# Altium PCB EtherWiz_Mini.PcbDoc (part 1 of 2)
Units mil, origin at the board's own origin, x right, y up, seen from the top; angles counter-clockwise.
Board outline 5188.98 x 2680 mil, 4 copper layers (Top Layer, GND, 5V, Bottom Layer), stack 23.756 mil thick; 69 components, 106 nets, 420 pads, 225 vias.
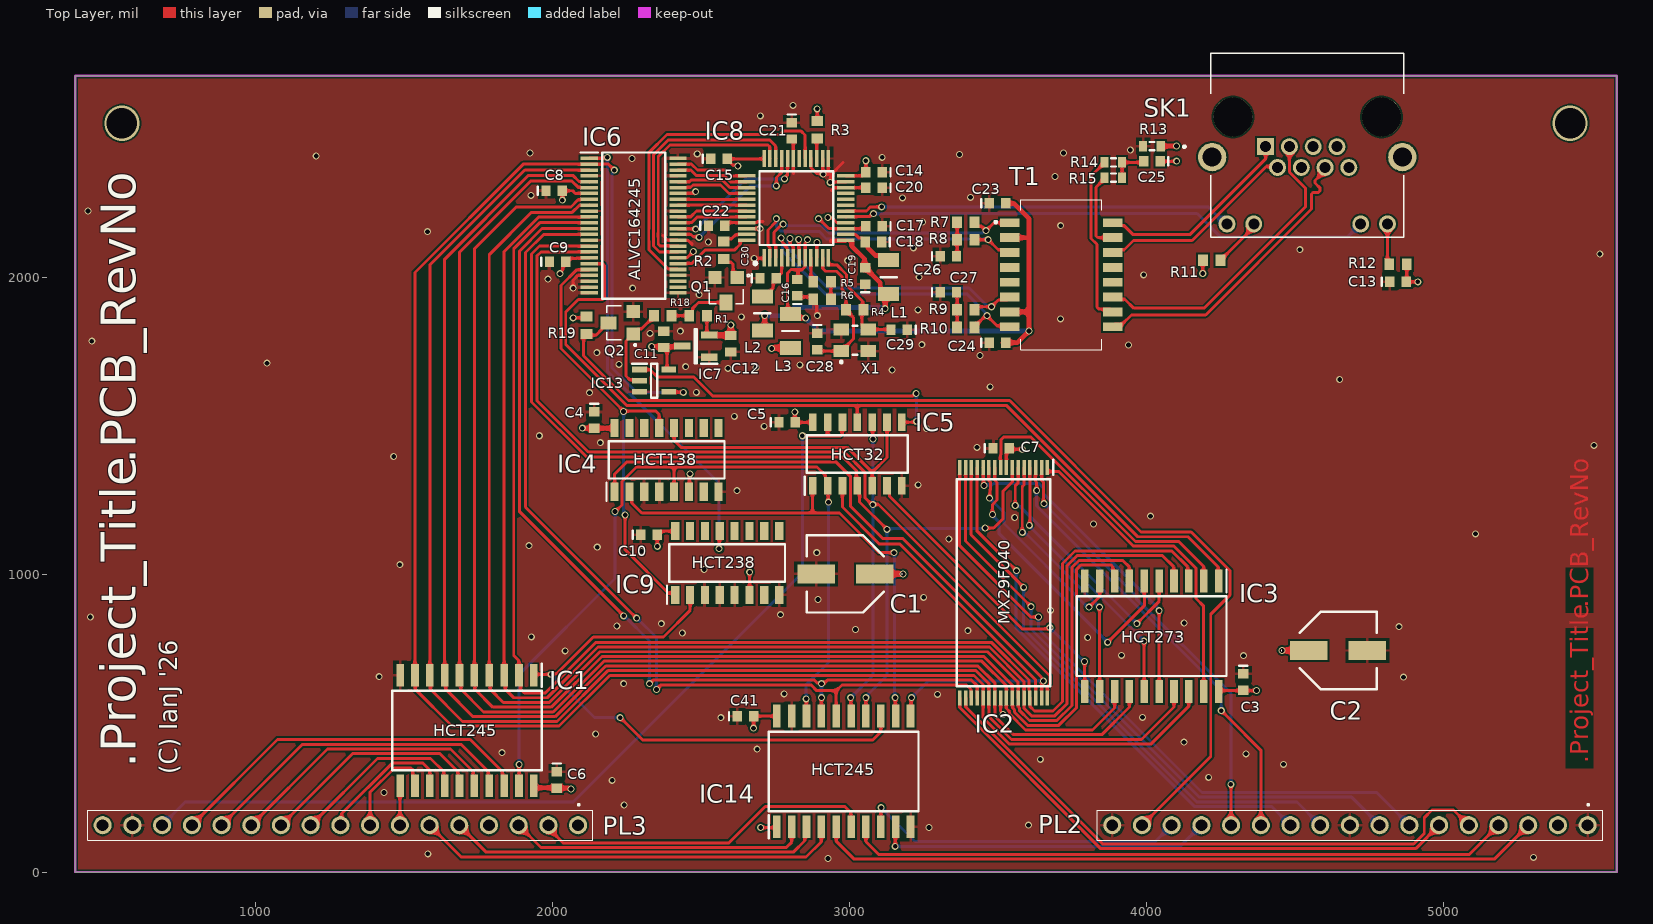
[diagram p0: Top Layer view]
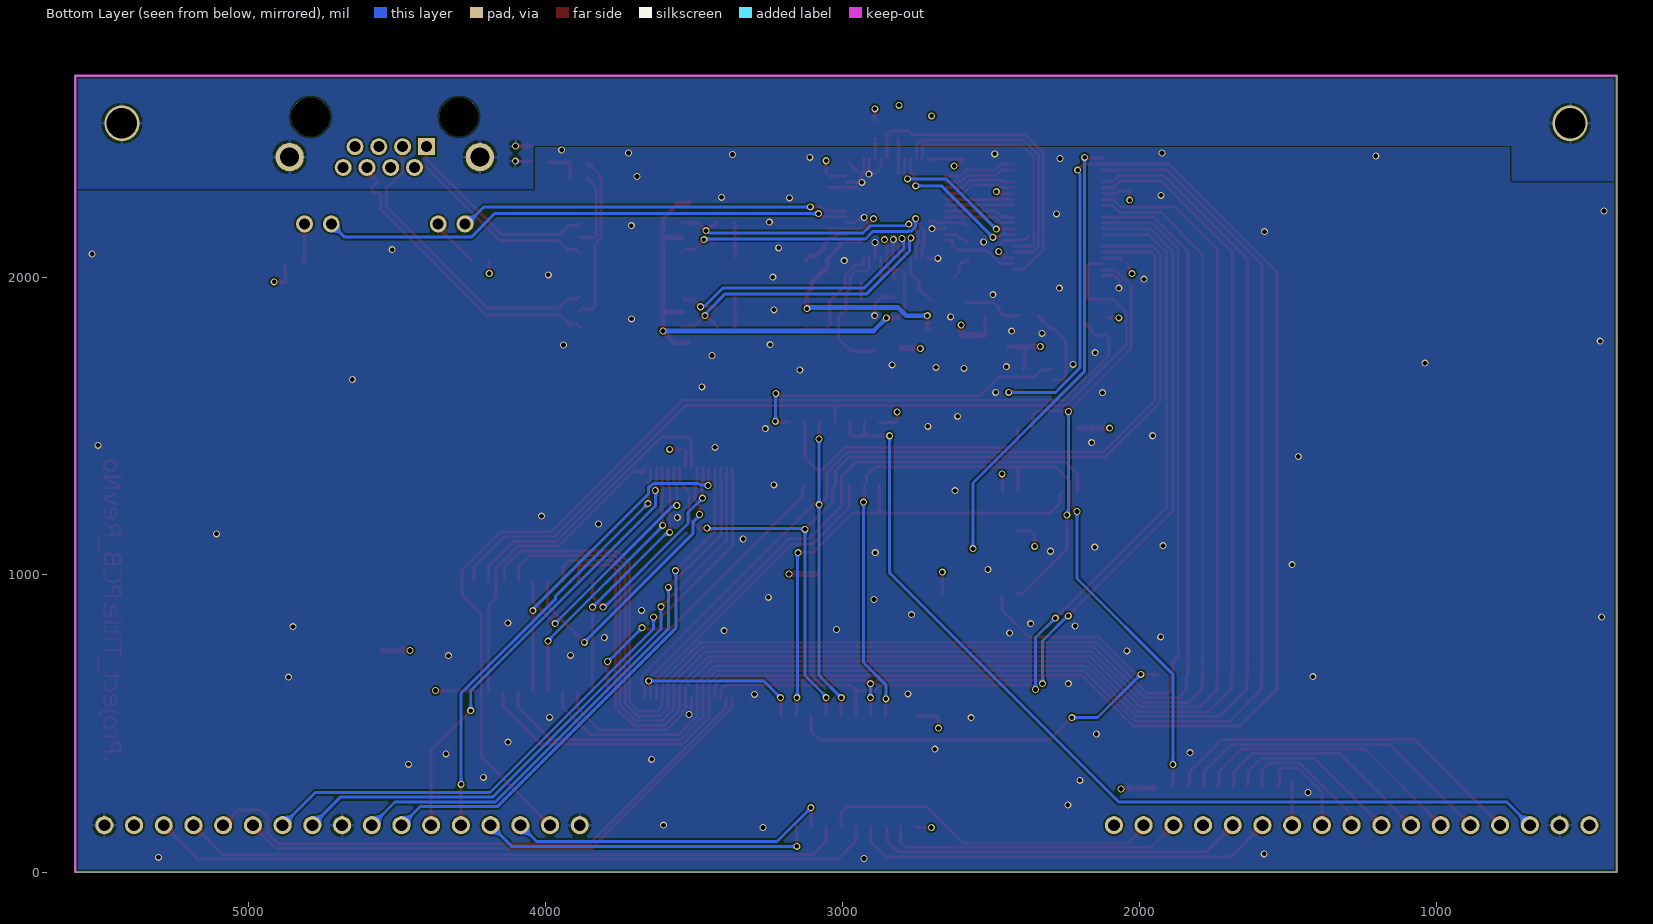
[diagram p1: Bottom Layer view, seen from below]
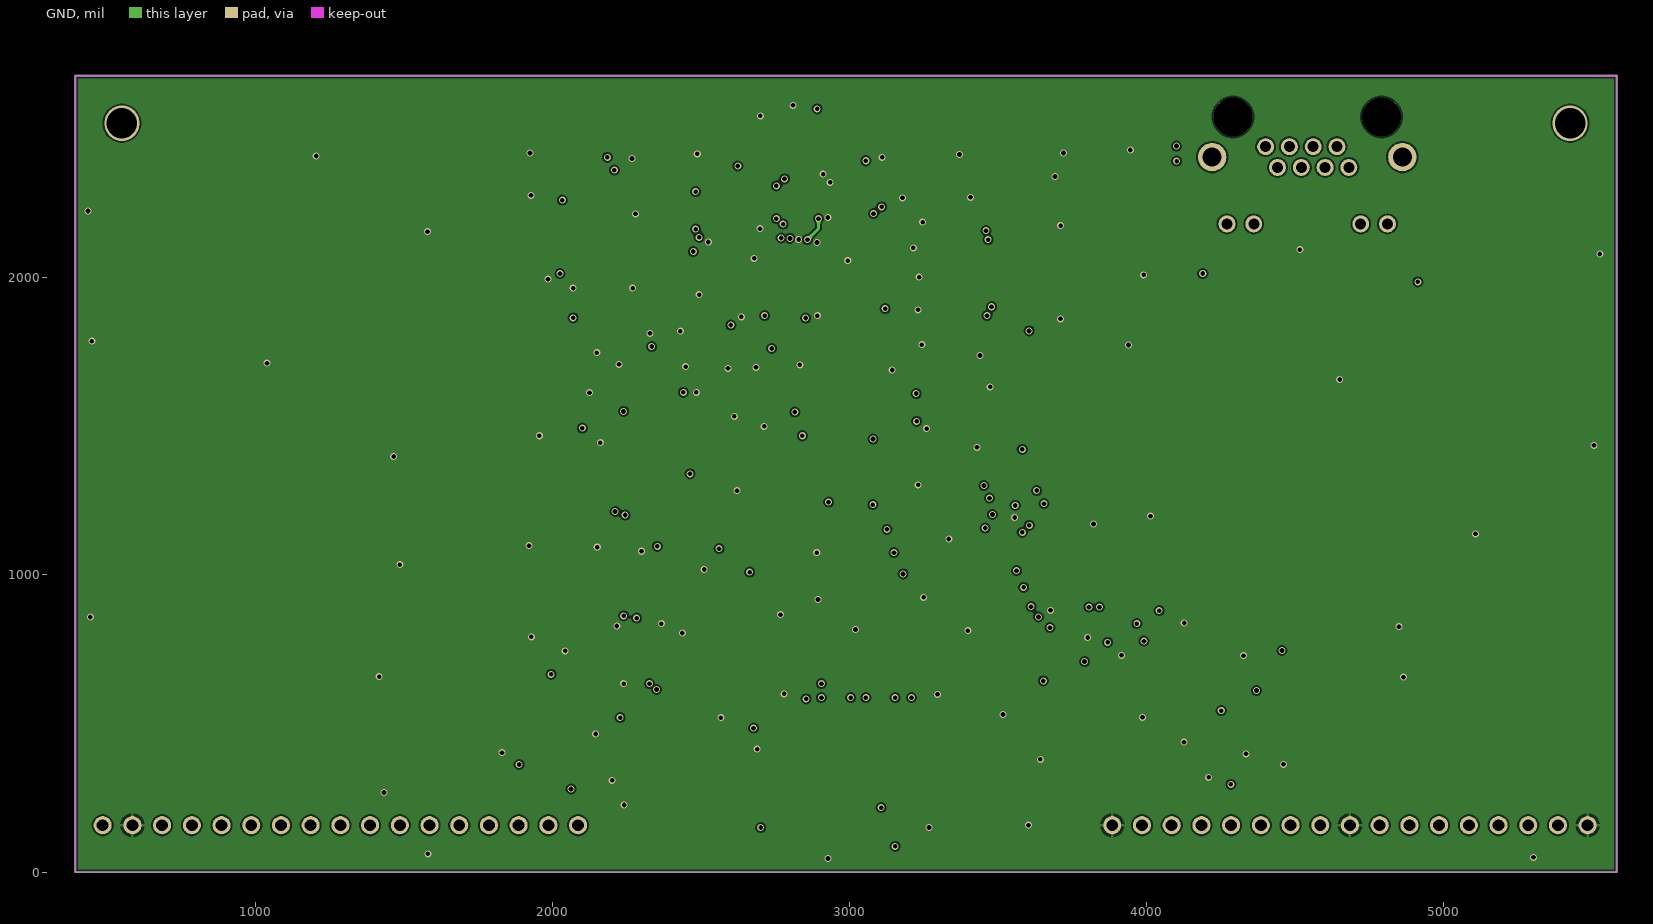
[diagram p2: GND]
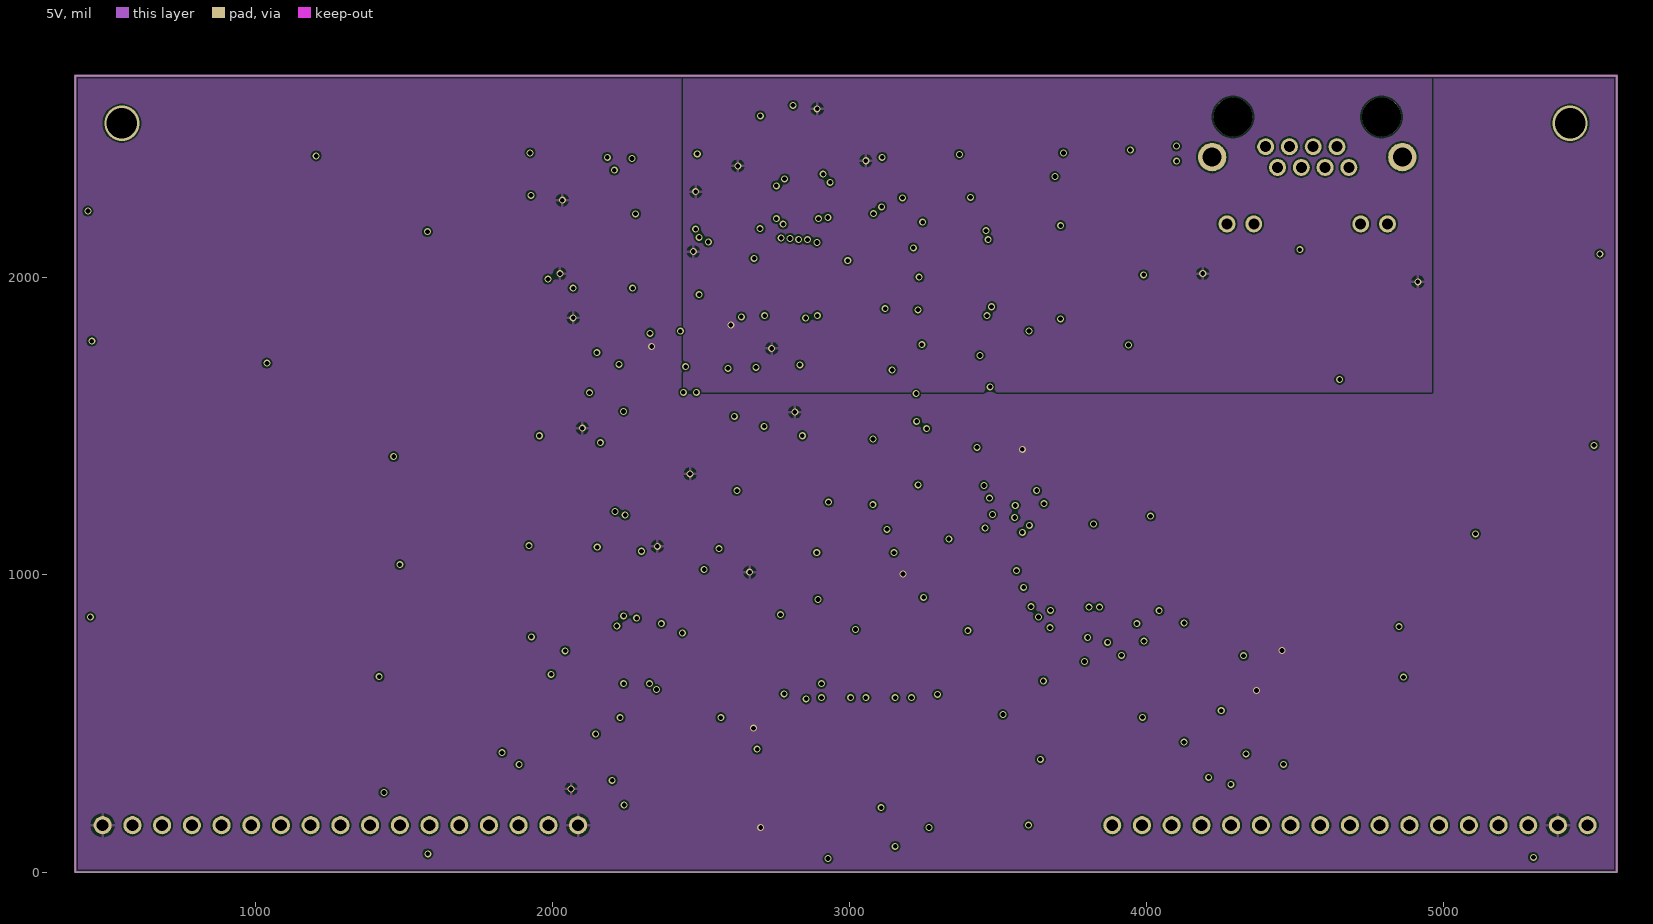
[diagram p3: 5V]
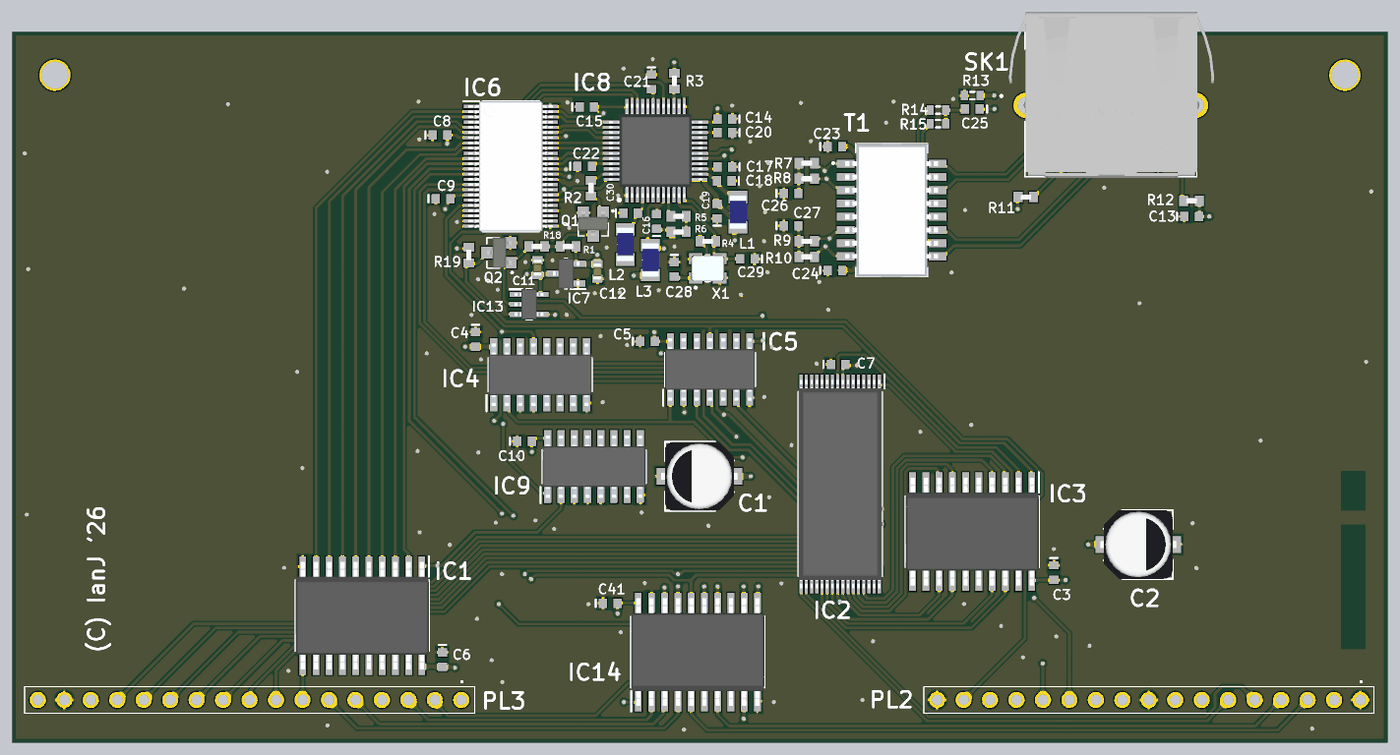
[diagram p5: 3D render of the assembled board from above, using the file's embedded part models]

## Layer stack, top to bottom
Top Solder: solder mask 0.4, Solder Resist, Dk 3.5
Top Layer: signal copper 1.4
Dielectric 1: prepreg 2.8, PP-006, Dk 4.1
GND: signal copper 1.378
Dielectric 2: prepreg 2.8, PP-006, Dk 4.1
5V: signal copper 1.378
Dielectric2: dielectric 12.6, FR-4, Dk 4.8
Bottom Layer: signal copper 1.4
Bottom Solder: solder mask 0.4, Solder Resist, Dk 3.5

## Board outline
393.7,0 5582.68,0 5582.68,2680 393.7,2680

## Design rules (kind name [scope] priority, off if disabled: settings)
Clearance [All] p1: gap=5.91 ignorepadtopadclearanceinfootprint=FALSE
DiffPairsRouting [All] p1: maxlimit=10 minlimit=10 mostfreqgap=10 toplayer_minwidth=10 toplayer_maxwidth=15 toplayer_prefwidth=10 midlayer1_minwidth=10 midlayer1_maxwidth=15 midlayer1_prefwidth=10 midlayer2_minwidth=10 midlayer2_maxwidth=15 midlayer2_prefwidth=10 bottomlayer_minwidth=10 bottomlayer_maxwidth=15 bottomlayer_prefwidth=10 maxuncoupledlength=500
HoleSize [All] p1: absolutevalues=TRUE maxlimit=196.85 minlimit=1 maxpercent=80.000 minpercent=20.000
MinimumSolderMaskSliver [All] p1: minsoldermaskwidth=3.94
PolygonConnect [All] p1: connectstyle=Relief reliefconductorwidth=10 reliefentries=4 polygonreliefangle="90 Angle" airgapwidth=10
RoutingVias [All] p1: holewidth=15.75 width=23.62 viastyle="Through Hole" minholewidth=15.75 minwidth=23.62 maxholewidth=28 maxwidth=50
SilkToSilkClearance [All] p1: silktosilkclearance=3.94
SilkToSolderMaskClearance [IsPad] p1: minsilkscreentomaskgap=3.94 clearancetoexposedcopper=TRUE
SolderMaskExpansion [All] p1: expansion=4 istentingtop=FALSE
SupplyNets "Schematic Supply Nets_8" [InNet('1v2d')] p1: voltage=0.000
SupplyNets "Schematic Supply Nets_7" [InNet('3v3a')] p2: voltage=0.000
SupplyNets "Schematic Supply Nets_5" [InNet('1v2o')] p3: voltage=0.000
SupplyNets "Schematic Supply Nets_4" [InNet('GND_CHASS')] p4: voltage=0.000
SupplyNets "Schematic Supply Nets_3" [InNet('GND')] p5: voltage=0.000
SupplyNets "Schematic Supply Nets_2" [InNet('1v2a')] p6: voltage=0.000
SupplyNets "Schematic Supply Nets_1" [InNet('3v3')] p7: voltage=0.000
SupplyNets "Schematic Supply Nets" [InNet('5V')] p8: voltage=0.000
Width [All] p1: maxlimit=19.68 minlimit=10 preferedwidth=10
25 further rules are at their usual default settings.

## Classes and differential pairs
component class EtherWiz_ROM: C3 C7 IC2 IC3
component class EtherWiz_Mini: C40 IC10 IC11 IC12 PL1 PL2 PL3 PL4 PL5_SK13 PL6_SK15 PL7_SK19 PL8_SK11 PL9_SK12 PL10_SK16 PL11 SK1_A4
component class EtherWiz: C1 C2 C4 C5 C8 C9 C10 C41 IC1 IC4 IC5 IC9 IC13 IC14
component class EtherWiz_Controller: C6 C11 C12 C13 C14 C15 C16 C17 C18 C19 C20 C21 C22 C23 C24 C25 C26 C27 C28 C29 C30 IC6 IC7 IC8 L1 L2 L3 Q1 Q2 R1 R2 R3 R4 R5 R6 R7 R8 R9 R10 R11 R12 R13 R14 R15 R18 R19 SK1 T1 X1
differential pair TX: +TX_P -TX_N
differential pair RX: +RX_P -RX_N
differential pair ETX: +ETX_P -ETX_N
differential pair ERX: +ERX_P -ERX_N

## Components (designator, comment, footprint, x,y, rotation, side; value= is the part's Value field where it differs from the comment)
C1 "EEE-HA1C470AP" EEE1AA101SP 2986.06,1003.23 r180 top
C2 "EEE-HA1C470AP" EEE1AA101SP 4644.37,745.51 r0 top
C3 "100n" CAPC1608L 4325.47,639.21 r270 top
C4 "100n" CAPC1608L 2140.43,1521.1 r270 top
C5 "100n" CAPC1608L 2790.04,1513.23 r0 top
C6 "100n" CAPC1608L 2014.92,310 r270 top
C7 "100n" CAPC1608L 3510.51,1426.61 r0 top
C8 "100n" CAPC1608L 2005.91,2293.46 r0 top
C9 "100n" CAPC1608L 2017.72,2053.31 r0 top
C10 "100n" CAPC1608L 2325.47,1135.28 r0 top
C11 "1uF" CAPC1608X90N 2374.87,1792.29 r270 top
C12 "1uF" CAPC1608X90N 2600.39,1777.72 r90 top
C13 "100n" CAPC1608L 4845.91,1986.1 r0 top
C14 "100n" CAPC1608L 3082.68,2354.33 r180 top
C15 "100n" CAPC1608L 2561.02,2399.76 r0 top
C16 "100n" CAPC1608L 2824.8,1966.69 r90 top
C17 "100n" CAPC1608L 3082.68,2173.23 r180 top
C18 "100nF" CAPC1608L 3080.71,2120.24 r180 top
C19 "100nF" CAPC1608L 3053.15,2006.06 r90 top
C20 "100nF" CAPC1608L 3082.68,2303.15 r180 top
C21 "100nF" CAPC1608L 2805.12,2494.25 r270 top
C22 "100nF" CAPC1608L 2553.15,2175.35 r0 top
C23 "100nF" CAPC1608L 3498.03,2250.16 r0 top
C24 "100nF" CAPC1608L 3498.03,1781.65 r0 top
C25 "1nF" CAPC1608L 4017.72,2391.89 r180 top
C26 "100nF" CAPC1608L 3332.68,2072.99 r0 top
C27 "100nF" CAPC1608L 3332.68,1950.94 r0 top
C28 "24pF" CAPC1608L 2891.73,1785.59 r270 top
C29 "24pF" CAPC1608L 3167.32,1824.96 r180 top
C30 "100nF" CAPC1608L 2726.38,1998.19 r0 top
C41 "100n" CAPC1608L 2649.61,523.62 r0 top
IC1 "SN74HCT245DWR" SOIC127P1030X265-20N 1712.6,476.38 r270 top locked
IC2 "MX29F040CTI-70G" SOP50P2000X120-32N 3518.39,973.86 r270 top locked
IC3 "SN74HCT273DWR" SOIC127P1030X265-20N 4017.01,793.74 r270 top locked
IC4 "74HCT138D,653" SOIC127P600X175-16N 2384.53,1387.24 r90 top locked
IC5 "74HCT32D" SOIC127P600X175-14N 3026.26,1406.93 r90 top locked
IC6 "74ALVC164245DGG_11" SOP50P810X120-48N 2273.62,2175.35 r0 top
IC7 "MCP1703AT-3302E_CB" SOT95P255X145-3N 2482.28,1769.84 r180 top
IC8 "W6100L" QFP50P900X900X160-48N 2820.87,2234.41 r90 top locked
IC9 "CD74HCT238M96" SOIC127P600X175-16N 2588.27,1039.8 r90 top locked
IC13 "74HCT1G125GV125" SOT95P275X110-5N 2342.52,1653.54 r0 top
IC14 "SN74HCT245DWR" SOIC127P1030X265-20N 2980.32,338.58 r90 top locked
L1 "782763800" INDC3216X130N 3131.89,2002.13 r270 top
L2 "782763800" INDC3216X130N 2706.69,1880.08 r90 top
L3 "782763800" INDC3216X130N 2801.18,1821.02 r90 top
PL2 "EW-17-12-G-S-550" TSW-117-XX-YY-S 5484.25,157.48 r180 top locked
PL3 "EW-17-12-G-S-550" TSW-117-XX-YY-S 2086.61,157.48 r180 top locked
Q1 "BC846" SOT-23 2584.65,1958.82 r180 top
Q2 "BC846" SOT-23 2230.31,1848.58 r90 top
R1 "100K" RESC1608X50N 2490.16,1872.2 r0 top
R2 "2K2" RESC1608X50N 2576.77,2092.68 r270 top
R3 "2K2" RESC1608X50N 2891.73,2498.19 r90 top
R4 "1M" RESC1608X50N 3017.72,1891.89 r180 top
R5 "12K" RESC1608X50N 2907.48,1986.38 r180 top
R6 "300R" RESC1608X50N 2907.48,1927.32 r0 top
R7 "50R" RESC1608X50N 3391.73,2187.17 r0 top
R8 "50R" RESC1608X50N 3391.73,2128.11 r0 top
R9 "50R" RESC1608X50N 3391.73,1891.89 r0 top
R10 "50R" RESC1608X50N 3391.73,1832.83 r0 top
R11 "300R" RESC1608X50N 4219.61,2059.17 r180 top
R12 "300R" RESC1608X50N 4845.91,2045.16 r0 top
R13 "0R" RESC1608L 4017.72,2443.07 r0 top
R14 "75R" RESC1608L 3887.8,2387.95 r180 top
R15 "75R" RESC1608L 3887.8,2336.77 r180 top
R18 "2K2" RESC1608X50N 2372.05,1872.2 r180 top
R19 "100K" RESC1608X50N 2115,1840 r90 top
SK1 "RJHSE5480" AMPHENOL_RJHSE5480 4540.47,2541.1 r180 top locked
T1 "PT61017PEL" PT61017PEL 3687.01,2010 r270 top locked
X1 "25MHz" ABM810000MHZ12D2W 3017.72,1789.53 r0 top

## Footprints (in the part's own frame and the unit in brackets; to place one, negate y for a bottom-side part, rotate by r counter-clockwise, add the part's x,y. Pads: shape width x height; smd on the part's side, far side on the other; paste and mask are expansions set on the pad)
ABM810000MHZ12D2W [mm]
  rect 1.3x1.05 smd: 1(-1.15,-0.925) 2(1.15,-0.925) 3(1.15,0.925) 4(-1.15,0.925)
  silkscreen extent -1.25,-1.95 0.2,1.25, body extent -1.6,-1.25 1.6,1.25, height 0.8
AMPHENOL_RJHSE5480 [mm]
  rect 1.448x1.448 / inner round 1.448 / far side rect 1.448x1.448 hole 0.94: 1(3.556,2.54)
  round 1.448 hole 0.94: 2(2.54,4.318) 3(1.524,2.54) 4(0.508,4.318) 5(-0.508,2.54) 6(-1.524,4.318) 7(-2.54,2.54) 8(-3.556,4.318) 9(6.858,9.144) 10(4.572,9.144) 11(-4.572,9.144) 12(-6.858,9.144)
  round 2.43 hole 1.62: S1(-8.13,3.43) S2(8.13,3.43)
  round 3.3 hole 3.3 unplated: ""(-6.35,0) ""(6.35,0)
  silkscreen extent -8.26,-5.46 10.6,10.29, body extent -9.93,-5.49 9.78,10.41, height 15.19
CAPC1608L [mm] "Chip Capacitor, Body 1.6x0.8mm, IPC High Density"
  rect 0.8x0.9 smd: 1(-0.7,0) 2(0.7,0)
  silkscreen extent -1.4,-0.35 -1.4,0.35, body extent -0.87,-0.48 0.87,0.48, height 0.85
CAPC1608X90N [mm]
  rect 0.78x0.99 smd: 1(-0.7,0) 2(0.7,0)
  body extent -0.8,-0.41 0.8,0.41, height 0.9
EEE1AA101SP [mm]
  rect 3.2x1.6 smd: 1(-2.5,0) 2(2.5,0)
  silkscreen extent -4.88,-3.3 3.3,3.3, body extent 0,0 0,0
INDC3216X130N [mm]
  rect 1.2x1.8 smd: 1(-1.45,0) 2(1.45,0)
  silkscreen extent 0,-0.7 0,0.7, body extent -1.6,-0.8 1.6,0.8, height 1.3
PT61017PEL [mm]
  rect 0.76x1.7 smd: 1(-4.445,-3.75) 2(-3.175,-3.75) 3(-1.905,-3.75) 4(-0.635,-3.75) 5(0.635,-3.75) 6(1.905,-3.75) 7(3.175,-3.75) 8(4.445,-3.75) 9(4.445,5.05) 10(3.175,5.05) 11(1.905,5.05) 12(0.635,5.05) 13(-0.635,5.05) 14(-1.905,5.05) 15(-3.175,5.05) 16(-4.445,5.05)
  silkscreen extent -6.4,-5.05 6.4,4.1, body extent -6.33,-3.8 6.45,5.1, height 5.14
QFP50P900X900X160-48N [mm]
  rect 1.475x0.3 smd: 1(-4.238,2.75) 2(-4.238,2.25) 3(-4.238,1.75) 4(-4.238,1.25) 5(-4.238,0.75) 6(-4.238,0.25) 7(-4.238,-0.25) 8(-4.238,-0.75) 9(-4.238,-1.25) 10(-4.238,-1.75) 11(-4.238,-2.25) 12(-4.238,-2.75) 25(4.238,-2.75) 26(4.238,-2.25) 27(4.238,-1.75) 28(4.238,-1.25) 29(4.238,-0.75) 30(4.238,-0.25) 31(4.238,0.25) 32(4.238,0.75) 33(4.238,1.25) 34(4.238,1.75) 35(4.238,2.25) 36(4.238,2.75)
  rect 0.3x1.475 smd: 13(-2.75,-4.238) 14(-2.25,-4.238) 15(-1.75,-4.238) 16(-1.25,-4.238) 17(-0.75,-4.238) 18(-0.25,-4.238) 19(0.25,-4.238) 20(0.75,-4.238) 21(1.25,-4.238) 22(1.75,-4.238) 23(2.25,-4.238) 24(2.75,-4.238) 37(2.75,4.238) 38(2.25,4.238) 39(1.75,4.238) 40(1.25,4.238) 41(0.75,4.238) 42(0.25,4.238) 43(-0.25,4.238) 44(-0.75,4.238) 45(-1.25,4.238) 46(-1.75,4.238) 47(-2.25,4.238) 48(-2.75,4.238)
  silkscreen extent -4.85,-3.15 3.15,3.62, body extent -4.5,-4.5 4.5,4.5, height 1.6
RESC1608L [mm] "Chip Resistor, Body 1.6x0.8mm, IPC High Density"
  rect 0.7x0.9 smd: 1(-0.75,0) 2(0.75,0)
  silkscreen extent -0.2,-0.35 0.2,0.35, body extent -0.8,-0.41 0.8,0.41, height 0.45
RESC1608X50N [mm]
  rect 0.85x1 smd: 1(-0.75,0) 2(0.75,0)
  body extent -0.5,-0.25 0.5,0.25, height 0.35
SOIC127P600X175-14N [mm]
  rect 1.525x0.65 smd: 1(-2.712,3.81) 2(-2.712,2.54) 3(-2.712,1.27) 4(-2.712,0) 5(-2.712,-1.27) 6(-2.712,-2.54) 7(-2.712,-3.81) 8(2.712,-3.81) 9(2.712,-2.54) 10(2.712,-1.27) 11(2.712,0) 12(2.712,1.27) 13(2.712,2.54) 14(2.712,3.81)
  silkscreen extent -3.47,-4.33 1.6,4.48, body extent -3,-4.33 3,4.33, height 1.75
SOIC127P600X175-16N [mm]
  rect 1.55x0.7 smd: 1(-2.725,4.445) 2(-2.725,3.175) 3(-2.725,1.905) 4(-2.725,0.635) 5(-2.725,-0.635) 6(-2.725,-1.905) 7(-2.725,-3.175) 8(-2.725,-4.445) 9(2.725,-4.445) 10(2.725,-3.175) 11(2.725,-1.905) 12(2.725,-0.635) 13(2.725,0.635) 14(2.725,1.905) 15(2.725,3.175) 16(2.725,4.445)
  silkscreen extent -3.5,-4.95 1.6,5.15, body extent -3,-4.95 3,4.95, height 1.75
SOIC127P1030X265-20N [mm]
  rect 1.95x0.65 smd: 1(-4.725,5.715) 2(-4.725,4.445) 3(-4.725,3.175) 4(-4.725,1.905) 5(-4.725,0.635) 6(-4.725,-0.635) 7(-4.725,-1.905) 8(-4.725,-3.175) 9(-4.725,-4.445) 10(-4.725,-5.715) 11(4.725,-5.715) 12(4.725,-4.445) 13(4.725,-3.175) 14(4.725,-1.905) 15(4.725,-0.635) 16(4.725,0.635) 17(4.725,1.905) 18(4.725,3.175) 19(4.725,4.445) 20(4.725,5.715)
  silkscreen extent -5.7,-6.4 3.4,6.4, body extent -5.16,-6.4 5.16,6.4, height 1.75
SOP50P810X120-48N [mm]
  rect 1.475x0.3 smd: 1(-3.788,5.75) 2(-3.788,5.25) 3(-3.788,4.75) 4(-3.788,4.25) 5(-3.788,3.75) 6(-3.788,3.25) 7(-3.788,2.75) 8(-3.788,2.25) 9(-3.788,1.75) 10(-3.788,1.25) 11(-3.788,0.75) 12(-3.788,0.25) 13(-3.788,-0.25) 14(-3.788,-0.75) 15(-3.788,-1.25) 16(-3.788,-1.75) 17(-3.788,-2.25) 18(-3.788,-2.75) 19(-3.788,-3.25) 20(-3.788,-3.75) 21(-3.788,-4.25) 22(-3.788,-4.75) 23(-3.788,-5.25) 24(-3.788,-5.75) 25(3.788,-5.75) 26(3.788,-5.25) 27(3.788,-4.75) 28(3.788,-4.25) 29(3.788,-3.75) 30(3.788,-3.25) 31(3.788,-2.75) 32(3.788,-2.25) 33(3.788,-1.75) 34(3.788,-1.25) 35(3.788,-0.75) 36(3.788,-0.25) 37(3.788,0.25) 38(3.788,0.75) 39(3.788,1.25) 40(3.788,1.75) 41(3.788,2.25) 42(3.788,2.75) 43(3.788,3.25) 44(3.788,3.75) 45(3.788,4.25) 46(3.788,4.75) 47(3.788,5.25) 48(3.788,5.75)
  silkscreen extent -4.52,-6.25 2.7,6.25, body extent -4.06,-6.25 4.06,6.25, height 1
SOP50P2000X120-32N [mm]
  rect 1.3x0.3 smd: 1(-9.85,3.75) 2(-9.85,3.25) 3(-9.85,2.75) 4(-9.85,2.25) 5(-9.85,1.75) 6(-9.85,1.25) 7(-9.85,0.75) 8(-9.85,0.25) 9(-9.85,-0.25) 10(-9.85,-0.75) 11(-9.85,-1.25) 12(-9.85,-1.75) 13(-9.85,-2.25) 14(-9.85,-2.75) 15(-9.85,-3.25) 16(-9.85,-3.75) 17(9.85,-3.75) 18(9.85,-3.25) 19(9.85,-2.75) 20(9.85,-2.25) 21(9.85,-1.75) 22(9.85,-1.25) 23(9.85,-0.75) 24(9.85,-0.25) 25(9.85,0.25) 26(9.85,0.75) 27(9.85,1.25) 28(9.85,1.75) 29(9.85,2.25) 30(9.85,2.75) 31(9.85,3.25) 32(9.85,3.75)
  silkscreen extent -10.5,-4 8.85,4.25, body extent -10,-4 10,4, height 1.2
SOT95P255X145-3N [mm]
  rect 1.4x0.6 smd: 1(-1.15,0.95) 2(-1.15,-0.95) 3(1.15,0)
  silkscreen extent -1.85,-1.45 0.1,1.5, body extent -1.28,-1.45 1.28,1.45, height 1.45
SOT95P275X110-5N [mm]
  rect 1.25x0.5 smd: 1(-1.25,0.95) 2(-1.25,0) 3(-1.25,-0.95) 4(1.25,-0.95) 5(1.25,0.95)
  silkscreen extent -1.88,-1.45 0.28,1.45, body extent -1.38,-1.45 1.38,1.45, height 1.1
SOT-23 [mil]
  rect 44x44 smd: 1(-37.5,-42) 2(37.5,-42)
  rect 44x54 smd: 3(-0.25,42)
  silkscreen extent -79,-52 57,47, body extent -57,-47 57,47, height 40
TSW-117-XX-YY-S [mm]
  round 1.55 hole 1.02: 1(0,0) 2(2.54,0) 3(5.08,0) 4(7.62,0) 5(10.16,0) 6(12.7,0) 7(15.24,0) 8(17.78,0) 9(20.32,0) 10(22.86,0) 11(25.4,0) 12(27.94,0) 13(30.48,0) 14(33.02,0) 15(35.56,0) 16(38.1,0) 17(40.64,0)
  silkscreen extent -1.27,-1.8 41.91,1.27

## Part data
C1 C2: "Capacitor Polarised", Manufacturer_Name=Panasonic, Mouser Part Number=667-EEE-HA1C470AP, Arrow Part Number=EEE-HA1C470AP, Arrow Price/Stock=https://www.arrow.com/en/products/eeeha1c470ap/panasonic?utm_currency=USD&region=europe, Datasheet Link=http://industrial.panasonic.com/cdbs/www-data/pdf/RDE0000/ABA0000C1148.pdf, Height=7.8mm, Manufacturer_Part_Number=EEE-HA1C470AP, Mouser Price/Stock=https://www.mouser.co.uk/ProductDetail/Panasonic/EEE-HA1C470AP?qs=d1CqaRUMZD%2FL5qU1hDRerg%3D%3D
C3 C4 C5 C6 C7 C8 C9 C10 C13 C14 C15 C16 C17 C41: library part CAP_100n_0603_50V_0, "CAP 100nF, 0603, 50V, X7R, 10%", Distributor1 Part No=CL10B104KB8NNNC, Distributor2 Part No=311-1344-2-ND, Manufacturer1=Samsung, Manufacturer2=Yageo, Voltage=50V, ComponentLink1Description=ComponentLinknURL1, ComponentLink1URL=https://media.digikey.com/pdf/Data%20Sheets/Samsung%20PDFs/CL_Series_MLCC_ds.pdf, ComponentLink2Description=ComponentLinknURL2, ComponentLink2URL=https://www.yageo.com/upload/media/product/productsearch/datasheet/mlcc/UPY-GPHC_X7R_6.3V-to-50V_18.pdf, Distributor1=Anglia, Distributor2=Digikey, ManuPart1=CL10B104KB8NNNC, ManuPart2=CC0603KRX7R9BB104
C11 C12: library part CL10A105KP8NNNC, "Capacitor", Manufacturer_Name=SAMSUNG, Mouser Part Number=187-CL10A105KP8NNNC, Arrow Part Number=CL10A105KP8NNNC, Arrow Price/Stock=https://www.arrow.com/en/products/cl10a105kp8nnnc/samsung-electro-mechanics?utm_currency=USD&region=nac, Datasheet Link=https://datasheet.lcsc.com/szlcsc/Samsung-Electro-Mechanics-CL10A105KP8NNNC_C26413.pdf, Height=0.9mm, Manufacturer_Part_Number=CL10A105KP8NNNC, Mouser Price/Stock=https://www.mouser.co.uk/ProductDetail/Samsung-Electro-Mechanics/CL10A105KP8NNNC?qs=349EhDEZ59qtu6tL%2F73n2A%3D%3D
C18 C19 C20 C21 C22 C30: library part 100nF0805, "Capacitor", Arrow Part Number=C2012X7R1H104K125AM, LCSC Part #=C111492, Manufacturer_Name=TDK, Mouser Part Number=810-C2012X7R1H104KT5, Arrow Price/Stock=https://www.arrow.com/en/products/c2012x7r1h104k125am/tdk, Datasheet Link=https://product.tdk.com/info/en/catalog/datasheets/mlcc_commercial_midvoltage_en.pdf, Height=1.45mm, Manufacturer_Part_Number=C2012X7R1H104K125AM, Mouser Price/Stock=https://www.mouser.com/Search/Refine.aspx?Keyword=810-C2012X7R1H104KT5
C23 C24 C26 C27: library part 909-0001-L, "Cap ceramic X7R/X5R 100nF 10% 16V C0603", Disti Part Number=432-210, LCSC Part #=C66501, Manufacturer=EPCOS, Tolerance=0.1, Voltage=16V, Component Type=Standard, Construction=X7R, Cost(£)=0.038, Distributer=Farnell, ManuPart=B37931-K9104-K60, Qualified2ndManu=Yageo, Qualified2ndPart=CC0603KRX7R7BB104, RoHS Compliant=YES
C25: library part 910-0053-L, "Cap ceramic X7R 1nF 10% 2kV C1206", Disti Part Number=1206GC102KAT1A, LCSC Part #=C23631, Manufacturer=AVX, Tolerance=0.1, Voltage=2000V, Component Type=Standard, Construction=X7R, Cost(£)=0.187, Distributer=Anglia, ManuPart=1206GC102KAT1A, RoHS Compliant=YES
C28 C29: library part CAP_10P_0603_50V_0, "CAP 10PF, 0603, 50V, NP0, 10%"
IC1 IC14: "Integrated Circuit", Manufacturer_Name="Texas Instruments", Mouser Part Number=595-SN74HCT245DWR, Arrow Part Number=SN74HCT245DWR, Arrow Price/Stock=https://www.arrow.com/en/products/sn74hct245dwr/texas-instruments?region=nac, Datasheet Link=https://datasheet.datasheetarchive.com/originals/distributors/SFDatasheet-6/sf-000131457.pdf, Height=2.65mm, Manufacturer_Part_Number=SN74HCT245DWR, Mouser Price/Stock=https://www.mouser.co.uk/ProductDetail/Texas-Instruments/SN74HCT245DWR?qs=st7IWvlL5%2FhHLMwvvkYTgw%3D%3D
IC2: "Integrated Circuit", Manufacturer_Name=Macronix, Arrow Part Number=MX29F040CTI-70G, Arrow Price/Stock=https://www.arrow.com/en/products/mx29f040cti-70g/macronix-international?region=nac, Datasheet Link=https://www.macronix.com/Lists/Datasheet/Attachments/7266/MX29F040C,%205V,%204Mb,%20v2.2.pdf, Height=1.2mm, Manufacturer_Part_Number=MX29F040CTI-70G
IC3: "Integrated Circuit", Manufacturer_Name="Texas Instruments", Mouser Part Number=595-SN74HCT273DWR, Arrow Part Number=SN74HCT273DWR, Arrow Price/Stock=https://www.arrow.com/en/products/sn74hct273dwr/texas-instruments, Datasheet Link=https://datasheet.datasheetarchive.com/originals/distributors/Datasheets-36/DSA-718641.pdf, Height=2.65mm, Manufacturer_Part_Number=SN74HCT273DWR, Mouser Price/Stock=https://www.mouser.co.uk/ProductDetail/Texas-Instruments/SN74HCT273DWR?qs=SL3LIuy2dWww%2FZr6up0MdA%3D%3D
IC4: "Integrated Circuit", Manufacturer_Name=Nexperia, Mouser Part Number=771-74HCT138D-T, Arrow Part Number=74HCT138D,653, Arrow Price/Stock=https://www.arrow.com/en/products/74hct138d653/nexperia?region=nac, Datasheet Link=https://assets.nexperia.com/documents/data-sheet/74HC_HCT138.pdf, Height=1.75mm, Manufacturer_Part_Number=74HCT138D,653, Mouser Price/Stock=https://www.mouser.co.uk/ProductDetail/Nexperia/74HCT138D653?qs=P62ublwmbi8MKahyK7iY6g%3D%3D
IC5: "Integrated Circuit", Manufacturer_Name=Toshiba, Mouser Part Number=N/A, Arrow Part Number=74HCT32D, Arrow Price/Stock=https://www.arrow.com/en/products/74hct32d/toshiba?region=nac, Datasheet Link=https://toshiba.semicon-storage.com/info/docget.jsp?did=37176&prodName=74HCT32D, Height=1.75mm, Manufacturer_Part_Number=74HCT32D, Mouser Price/Stock=https://www.mouser.co.uk/ProductDetail/Toshiba/74HCT32D?qs=j%252B1pi9TdxUZqVZos7uP1Yw%3D%3D
IC6: "Integrated Circuit", Arrow Part Number=74ALVC164245DGG:11, Manufacturer_Name=Nexperia, Mouser Part Number=771-74ALVC164245, Arrow Price/Stock=https://www.arrow.com/en/products/74alvc164245dgg11/nexperia?utm_currency=USD&region=nac, Datasheet Link=https://assets.nexperia.com/documents/data-sheet/74ALVC164245.pdf, Height=1.2mm, Manufacturer_Part_Number=74ALVC164245DGG:11, Mouser Price/Stock=https://www.mouser.co.uk/ProductDetail/Nexperia/74ALVC164245DGG11?qs=odJ8N4Y39o4j0ykFPcnqaQ%3D%3D
IC7: "Integrated Circuit", Arrow Part Number=MCP1703AT-3302E/CB, Manufacturer_Name=Microchip, Mouser Part Number=579-MCP1703AT3302ECB, Arrow Price/Stock=https://www.arrow.com/en/products/mcp1703at-3302ecb/microchip-technology?region=nac, Datasheet Link=http://uk.rs-online.com/web/p/products/7709509, Height=1.45mm, Manufacturer_Part_Number=MCP1703AT-3302E/CB, Mouser Price/Stock=https://www.mouser.co.uk/ProductDetail/Microchip-Technology/MCP1703AT-3302E-CB?qs=PZkJWYMe7leeY97bgTp%252B9w%3D%3D
IC8: "Integrated Circuit", Manufacturer_Name="WIZnet Inc", Mouser Part Number=950-W6100L, Datasheet Link=https://eu.mouser.com/datasheet/2/443/w6100_ds_v104e-1994614.pdf, Height=1.6mm, Manufacturer_Part_Number=W6100L, Mouser Price/Stock=https://www.mouser.co.uk/ProductDetail/WIZnet/W6100L?qs=pUKx8fyJudARLmbJE2EKlA%3D%3D
IC9: "Integrated Circuit", Manufacturer_Name="Texas Instruments", Mouser Part Number=595-CD74HCT238M96, Datasheet Link=http://www.ti.com/lit/gpn/cd74hct238, Height=1.75mm, Manufacturer_Part_Number=CD74HCT238M96, Mouser Price/Stock=https://www.mouser.co.uk/ProductDetail/Texas-Instruments/CD74HCT238M96?qs=xFfolx0DHx1u%2Fks4%2FbIqqQ%3D%3D
IC13: "Integrated Circuit", Manufacturer_Name=Nexperia, Datasheet Link=https://assets.nexperia.com/documents/data-sheet/74HC_HCT1G125.pdf, Height=1.1mm, Manufacturer_Part_Number=74HCT1G125GV125
L1 L2 L3: library part 74279215, "Inductor", Manufacturer_Name="Wurth Elektronik", Mouser Part Number=710-782763800, Datasheet Link=http://componentsearchengine.com/Datasheets/1/74279215.pdf, Height=1.3mm, Manufacturer_Part_Number=782763800, Mouser Price/Stock=https://www.mouser.co.uk/ProductDetail/Wurth-Elektronik/74279215?qs=5twSNpOB8IC%252BebnV0jQtuw%3D%3D
PL2 PL3: library part TSW-117-05-G-S, "Connector", Manufacturer_Name=SAMTEC, Datasheet Link=http://suddendocs.samtec.com/prints/tsw-xxx-xx-xxx-x-xx-xxx-mkt.pdf, Manufacturer_Part_Number=TSW-117-05-G-S
Q1 Q2: library part TRANS_NPN_BC846_0, "Transistor NPN, 65V, 100mA, TO-236AB/SOT23"
R1 R19: library part 920-0030-L, "Resistor 100K 1%  0603"
R2 R3 R18: library part 920-0030-L, "Resistor 2K2 1%  0603", Disti Part Number=2447434, LCSC Part #=C127449, Manufacturer=Multicomp, Power=63mW, Tolerance=0.01, Component Type=Standard, Construction="Thick Film", Cost(£)=0.025, Distributer=Farnell, ManuPart=MCWR06X75R0FTL, RoHS Compliant=YES
R4: library part 920-0030-L, "Resistor 1M 1%  0603", Disti Part Number=2447434, LCSC Part #=C127449, Manufacturer=Multicomp, Power=63mW, Tolerance=0.01, Component Type=Standard, Construction="Thick Film", Cost(£)=0.025, Distributer=Farnell, ManuPart=MCWR06X75R0FTL, RoHS Compliant=YES
R5: library part 920-0030-L, "Resistor 12K 1%  0603", Disti Part Number=2447434, LCSC Part #=C127449, Manufacturer=Multicomp, Power=63mW, Tolerance=0.01, Component Type=Standard, Construction="Thick Film", Cost(£)=0.025, Distributer=Farnell, ManuPart=MCWR06X75R0FTL, RoHS Compliant=YES
R6: library part 920-0030-L, "Resistor 300R 1%  0603", Disti Part Number=2447434, LCSC Part #=C127449, Manufacturer=Multicomp, Power=63mW, Tolerance=0.01, Component Type=Standard, Construction="Thick Film", Cost(£)=0.025, Distributer=Farnell, ManuPart=MCWR06X75R0FTL, RoHS Compliant=YES
R7 R8 R9 R10: library part 920-0030-L, "Resistor 50R 1%  0603", Disti Part Number=2447434, LCSC Part #=C127449, Manufacturer=Multicomp, Power=63mW, Tolerance=0.01, Component Type=Standard, Construction="Thick Film", Cost(£)=0.025, Distributer=Farnell, ManuPart=MCWR06X75R0FTL, RoHS Compliant=YES
R11 R12: library part 920-0030-L, "Resistor 300R 1%  0603"
R13: library part 920-0001-L, "Resistor 0R0 1A Max 0603", Disti Part Number=923-3130, LCSC Part #=C844718, Manufacturer=Vishay, Component Type=Standard, Construction="Thick Film", Cost(£)=0.056, Distributer=Farnell, ManuPart=CRCW06030000Z0EA, Qualified2ndManu=Yageo, Qualified2ndPart=RC0603JR-070RL, RoHS Compliant=YES
R14 R15: library part 920-0030-L, "Resistor 75R 1%  0603", Disti Part Number=2447434, LCSC Part #=C127449, Manufacturer=Multicomp, Power=63mW, Tolerance=0.01, Component Type=Standard, Construction="Thick Film", Cost(£)=0.025, Distributer=Farnell, ManuPart=MCWR06X75R0FTL, RoHS Compliant=YES
SK1: "Ethernet socket - through hole", Disti Part Number=2709018, Manufacturer=Amphenol, Distributer=Farnell, ManuPart=RJHSE-5480
T1: "Transformer", Disti Part Number=652-PT61017PEL, LCSC Part #=C124001, Manufacturer=Bourns, Arrow Price/Stock=https://www.arrow.com/en/products/pt61017pel/bourns?region=europe, Datasheet Link=http://www.bourns.com/docs/Product-Datasheets/pt61017pel.pdf, Distributer=Mouser, Height=5mm, ManuPart=PT61017PEL, Mouser Price/Stock=https://www.mouser.co.uk/ProductDetail/Bourns/PT61017PEL?qs=0rbOLB9uh%252BASY8PB9lbWrQ%3D%3D
X1: library part ABM8-25.000MHZ-D2X-T, "Crystal or Oscillator", Manufacturer_Name=ABRACON, Mouser Part Number=815-ABM825MHZD2XT, Arrow Part Number=ABM8-25.000MHZ-D2X-T, Arrow Price/Stock=https://www.arrow.com/en/products/abm8-25.000mhz-d2x-t/abracon?region=nac, Datasheet Link=https://abracon.com/Resonators/abm8.pdf, Height=0.8mm, Manufacturer_Part_Number=ABM8-25.000MHZ-D2X-T, Mouser Price/Stock=https://www.mouser.co.uk/ProductDetail/ABRACON/ABM8-25.000MHZ-D2X-T?qs=XeJtXLiO41RuPiM7CXbPRQ%3D%3D

## Via types
v1: diameter 23.62, hole 15.75, Top Layer to Bottom Layer, tented both sides, 223 vias
v2: diameter 118.11/118.11/118.11/118.11 (per signal layer), hole 102.36, Top Layer to Bottom Layer, 2 vias

## Nets (pads, with @x,y where several pads share a name; then routed paths per layer and width w, separated by ;. In a path a pad name is that pad's centre, name@x,y a point inside that pad or via, vN(x,y) a via of type N, cw(c..) or ccw(c..) an arc to the next point about the centre after c; other vN are vias at no path point)
1v2a: C30.2 IC8.4 L2.2 | length 175.8
  Top Layer w10: L2.2@2700.79,1923.39 2719.41,1942.01 2723.35,1942.01 2737.13,1955.79 2737.13,1959.72 2743.19,1965.79 2743.19,1988.32 2771.65,2016.78 IC8.4@2771.65,2067.56
1v2d: C19.2 C20.2 C21.2 C22.2 IC8.13 IC8.22 IC8.31 IC8.45 L1.2 L2.1 | length 1168.1
  Top Layer w10: C22.2@2580.71,2175.02 2591.46,2185.77 IC8.45@2653.44,2185.77 ; IC8.45@2654.02,2185.2 2654.92,2186.1 2687.92,2186.1 2690.59,2188.77 2709.47,2188.77 ; 2811.02,2350.55 IC8.31@2811.02,2401.26 2811.02,2456.85 2812.99,2458.82 C21.2@2812.99,2470.63 ; 2938.98,2293.46 2939.61,2293.46 2949.45,2303.31 IC8.22@2987.72,2303.31 3051.18,2303.31 C20.2@3053.15,2305.28
  Top Layer w15.75: L2.1@2706.69,1822.99 2714.57,1830.87 v1(2714.57,1872.2) ; 2938.89,2124.26 IC8.13@2985.83,2124.26 ; IC8.13@3007.69,2124.17 3007.69,2106.48 3050.41,2063.77 3050.41,2036.37 C19.2@3053.15,2033.62 3055.12,2033.62 3062.99,2025.75 3062.99,2023.78 3103.71,1983.06 3103.71,1970.01 3104.33,1969.4 3104.33,1960.79 3120.08,1945.04 v1(3120.08,1895.83)
  Bottom Layer w15.75: v1(2714.57,1872.2) 2784.91,1872.2 2812.47,1899.76 3114.01,1899.76 3117.95,1895.83 v1(3120.08,1895.83)
1v2o: C18.2 IC8.14 L1.1 | length 180.3
  Top Layer w10: IC8.14@2987.72,2145.83 2988.62,2144.92 3020.59,2144.92 3032.56,2132.95 3036.54,2132.95 3042.4,2132.95 3053.15,2122.2 C18.2@3053.15,2120.24
  Top Layer w15.75: C18.2@3053.15,2120.24 3061.02,2112.36 3061.02,2100.39 3086.49,2074.93 3108.3,2074.93 L1.1@3124.02,2059.21
3v3: C12.2 C13.2 C14.2 C15.2 IC6.31 IC6.42 IC7.2 IC8.24 IC8.36 L3.1 R1.2 R3.2 R11.2 R12.2 | length 829.2
  Top Layer w10: IC6.31@2422.76,2067.09 2423.66,2067.99 2454.34,2067.99 v1(2474.41,2088.06) ; IC6.42@2422.76,2283.62 2472.69,2283.62 2478.6,2289.53 v1(2482.28,2289.53) ; IC7.2@2519.69,1809.21 R1.2@2519.69,1872.2 ; C15.2@2588.58,2397.8 2607.63,2378.75 2621.41,2378.75 v1(2624.02,2376.14) ; C15.2@2588.58,2399.76 2711.69,2399.76 2712.6,2400.67 IC8.36@2712.6,2401.26 ; R3.2@2891.73,2527.72 v1@2891.73,2569.06 ; IC8.24@2987.72,2342.68 3043.31,2342.68 C14.2@3053.15,2352.52 ; C14.2@3055.12,2354.33 v1(3055.12,2393.7) ; v1(4188.82,2014.13) R11.2@4188.82,2057.91 ; C13.2@4873.46,1986.1 v1(4912.83,1986.1) ; C13.2@4875.43,1986.1 R12.2@4875.43,2045.16
  Top Layer w19.68: IC7.2@2519.69,1809.21 2521.65,1807.24 IC7.2@2527.56,1807.24 ; IC7.2@2527.77,1806.26 2599.41,1806.26 C12.2@2600.39,1805.28 ; C12.2@2600.39,1804.16 v1(2600.39,1840.71) ; v1(2738.19,1761.97) 2739.25,1761.97 2741.22,1763.94 L3.1@2801.18,1763.94
  other v1: 2891.25,2568.3
3v3a: C16.2 C17.2 C23.2 C24.2 IC8.8 IC8.15 L3.2 T1.2 T1.7 | length 2147.3
  Top Layer w10: L3.2@2801.18,1878.11 2792.09,1887.2 2792.09,2016.21 2803.49,2027.62 2812.63,2027.62 2826.77,2027.62 ; C16.2@2826.77,1994.25 2826.77,2027.62 ; v1(2858.46,2128) 2858.46,2124.31 2850.39,2116.25 IC8.8@2850.39,2067.56 2849.49,2066.65 2849.49,2035.98 2841.13,2027.62 2826.77,2027.62 ; v1(2895.67,2198.98) 2896.83,2198.98 2930.29,2165.51 IC8.15@2987.72,2165.51 3051.18,2165.51 C17.2@3053.15,2167.48
  Top Layer w15.75: L3.2@2801.18,1878.11 2814.96,1864.33 v1(2852.36,1864.33) ; C24.2@3516.46,1781.65 3564.96,1781.65 v1(3604.33,1821.02) 3604.33,1885 ; C23.2@3517.72,2250.16 3553.15,2250.16 3604.33,2198.98 3604.33,2144.96 3604.33,2135 3604.33,1885 ; C23.2@3517.72,2258.03 C23.2@3525.59,2250.16 ; T1.7@3539.37,1885 3604.33,1885 ; T1.2@3539.37,2135 3598.76,2135
  GND w10: v1(2858.46,2128) 2895.67,2165.21 v1(2895.67,2198.98)
  Bottom Layer w15.75: v1(2852.36,1864.33) 2895.67,1821.02 v1(3604.33,1821.02)
5V: C1.1 C2.1 C3.2 C4.2 C5.2 C6.2 C7.2 C8.2 C9.2 C10.2 C11.2 C41.2 IC1.20 IC2.8 IC3.20 IC4.6 IC4.16 IC5.14 IC6.7 IC6.18 IC7.3 IC9.6 IC9.16 IC13.5 IC14.1 IC14.20 PL2.2 PL3.1 PL3.17 R19.2 | length 1634.3
  Top Layer w10: v1(2025.59,2013.94) 2025.59,2017.62 2034.53,2026.56 2034.53,2042.56 C9.2@2045.28,2053.31 ; v1(2033.46,2261.06) C8.2@2033.46,2293.46 ; C8.2@2035.43,2295.43 2038.15,2292.72 2068.24,2292.72 2077.33,2283.62 IC6.7@2124.49,2283.62 ; C9.2@2057.09,2065.12 2080.71,2065.12 2081.77,2066.18 2095.71,2066.18 2123.58,2066.18 IC6.18@2124.49,2067.09 ; v1(2070,1865) 2110.47,1865 R19.2@2115,1869.53 ; v1(2353.03,1095.91) C10.2@2353.03,1135.28 ; C10.2@2353.03,1136.34 2363.78,1147.09 IC9.16@2413.27,1147.09 ; C11.2@2374.87,1764.73 2379,1764.73 2385.83,1757.9 2385.83,1695.79 2390.67,1690.94 IC13.5@2391.73,1690.94 ; IC4.6@2459.53,1279.96 2461.4,1281.83 2461.4,1338.13 v1(2463.27,1340) ; IC9.6@2663.27,932.52 2663.66,932.91 2663.66,1008.9 v1(2664.06,1009.29) ; v1(2677.17,484.25) C41.2@2677.17,523.62 2678.15,524.61 IC14.20@2755.32,524.61 ; v1(2700.79,149.61) 2752.36,149.61 IC14.1@2755.32,152.56 ; v1(2816.06,1547.99) 2816.06,1514.76 C5.2@2817.6,1513.23 2875.79,1513.23 IC5.14@2876.26,1513.7 ; IC2.8@3528.23,1361.65 C7.2@3528.23,1418.4 ; C7.2@3538.07,1426.61 3542.01,1422.68 v1(3581.38,1422.68) ; IC3.20@4239.54,610.76 v1(4369.57,610.76)
  Top Layer w15.75: IC1.20@1945.18,283.46 2015.91,283.46 2016.93,282.44 2057.95,282.44 2060.86,279.53 v1(2062.99,279.53) ; v1(2101.06,1493.54) C4.2@2135.51,1493.54 ; C4.2@2140.43,1493.54 2208.54,1493.54 IC4.16@2209.53,1494.53 ; v1(2334.18,1768.34) 2370.6,1768.34 C11.2@2372.05,1766.89 ; C11.2@2372.44,1767.29 2439.67,1767.29 IC7.3@2442.33,1769.95
  Top Layer w19.68: C1.1@3084.49,1003.23 v1(3180.2,1003.23) ; v1(4455.39,745.51) C2.1@4545.94,745.51
/PIRQ: PL2.16 Q2.3 R19.1 | length 3647.3
  Top Layer w10: R19.1@2115,1810.47 2105,1800.47 2105,1737.52 2255.91,1586.61 3538.86,1586.61 3981.22,1144.25 4150.04,1144.25 4281.06,1013.23 4281.06,933.23 4215.71,867.87 4215.71,388.94 PL2.16@3984.25,157.48 ; R19.1@2124.13,1806.65 2146.63,1806.65 Q2.3@2166.31,1826.33 ; Q2.3@2166.31,1826.33 Q2.3@2188.31,1848.33 2183.31,1848.33 2166.31,1831.33 Q2.3@2166.31,1826.33
/PRE_IORD: IC14.5 PL2.3 | length 2450.1
  Top Layer w10: IC14.5@2955.32,152.56 2955.32,103.74 3015.75,43.31 5170.08,43.31 PL2.3@5284.25,157.48
/PS: IC14.2 PL3.3 | length 1009.2
  Top Layer w10: PL3.3@1886.61,157.48 1961.57,82.52 2787.24,82.52 2805.32,100.59 IC14.2@2805.32,152.56
/PWE_IOWR: IC14.6 PL3.2 | length 1155.3
  Top Layer w10: PL3.2@1986.61,157.48 1986.61,147.24 2035.43,98.43 2594.49,98.43 2716.54,220.47 2984.25,220.47 3004.64,200.09 3004.64,153.24 IC14.6@3005.32,152.56
/RST: IC5.12 IC5.13 PL3.15 | length 3191.5
  Top Layer w10: v1(2841.06,1468.23) 2841.73,1467.56 2926.26,1467.56 ; IC5.13@2926.26,1513.7 2926.26,1467.56 ; IC5.12@2976.26,1513.7 2975.08,1512.52 2975.08,1473.42 2969.22,1467.56 2926.26,1467.56
  Bottom Layer w10: PL3.15@686.61,157.48 765.35,236.22 2070.87,236.22 2841.06,1006.42 v1(2841.06,1468.23)
B/PRE_IORD: IC2.32 IC5.10 IC6.17 IC14.15 | length 3929.2
  Top Layer w10: IC6.17@2124.49,2086.77 1961.77,2086.77 1947.76,2072.76 1947.76,1586.54 2121.06,1413.23 2983.4,1413.23 3052.56,1344.07 3052.56,1259.09 3075.42,1236.22 v1(3078.74,1236.22) 3079.53,1237.01 3097.45,1237.01 3674.96,659.5 3674.96,633.74 3666.02,624.8 IC2.32@3666.02,586.06 ; v1(3003.94,586.61) 3004.63,585.93 3004.63,525.3 IC14.15@3005.32,524.61 ; IC5.10@3076.26,1513.7 3077.69,1512.27 3077.69,1458.49 v1(3079.12,1457.06)
  Bottom Layer w10: v1(3003.94,586.61) 3078.74,661.42 v1(3078.74,1236.22) 3078.93,1236.41 3078.93,1456.5 v1@3078.74,1456.69
B/PS: IC1.19 IC4.5 IC5.2 IC14.18 | length 2818.1
  Top Layer w10: IC1.19@1887.6,290.35 1887.93,290.69 1887.93,361.5 v1(1888.27,361.84) ; v1(2211.06,1213.23) 2212.37,1213.23 2234.21,1235.07 2234.21,1314.36 2283.08,1363.23 2409.53,1363.23 ; IC4.5@2409.53,1279.96 2409.53,1363.23 ; v1(2854.33,582.68) 2854.82,582.18 2854.82,525.1 IC14.18@2855.32,524.61 ; v1(2929.51,1244.84) 2927.89,1246.46 2927.89,1298.53 IC5.2@2926.26,1300.16 2918.46,1307.95 2918.46,1335.22 2890.46,1363.23 2409.53,1363.23
  Bottom Layer w10: v1@1889.76,358.27 1888.27,359.76 1888.27,665.44 2211.06,988.23 v1(2211.06,1213.23) ; v1(2854.33,582.68) 2854.33,629.92 2929.13,704.72 v1@2929.13,1244.47
B/PWE_IOWR: IC2.7 IC5.4 IC6.16 IC14.14 | length 3376.7
  Top Layer w10: IC6.16@2124.49,2106.46 1956.46,2106.46 1930,2080 1930,1581.8 2114.47,1397.32 2976.81,1397.32 3023,1351.13 IC5.4@3023,1300.16 ; IC5.4@3026.26,1300.16 3034.01,1292.4 3034.01,1245.28 v1(3126.06,1153.23) ; v1(3055.12,586.61) 3055.22,586.52 3055.22,524.7 IC14.14@3055.32,524.61 ; v1(3456.69,1157.48) 3485.31,1157.48 3515.79,1187.96 3515.79,1280.39 3547.91,1312.51 IC2.7@3547.91,1361.65
  Bottom Layer w10: v1@3055.12,590.55 3126.06,661.5 v1(3126.06,1153.23) 3128.19,1155.35 3454.57,1155.35 v1(3456.69,1157.48)
B/RST: IC3.1 IC5.11 IC6.19 | length 3031.9
  Top Layer w10: IC6.19@2124.49,2047.4 2169.18,2047.4 2175.04,2041.54 2175.04,1933.02 2169.18,1927.17 2087.17,1927.17 2045,1885 2045,1775.03 2249.32,1570.71 3026,1570.71 ; IC5.11@3026.26,1513.7 3026,1513.96 3026,1570.71 ; IC3.1@4242.01,979.76 4240.54,981.23 4240.54,1027.29 4139.49,1128.35 3970.2,1128.35 3527.83,1570.71 3026,1570.71
BD0: IC1.11 PL3.7 | length 146.1
  Top Layer w10: PL3.7@1486.61,157.48 1487.11,157.97 1487.11,289.86 IC1.11@1487.6,290.35 IC1.11@1487.6,303.15
BD1: IC1.12 PL3.8 | length 348
  Top Layer w10: PL3.8@1386.61,157.48 1386.61,268.5 1468.5,350.39 1523.95,350.39 1529.8,344.54 1529.8,298.15 IC1.12@1537.6,290.35
BD2: IC1.13 PL3.9 | length 470.5
  Top Layer w10: PL3.9@1286.61,157.48 1291.47,162.34 1291.47,196.98 1460.79,366.3 1565.04,366.3 1587.6,343.74 IC1.13@1587.6,290.35
BD3: IC1.14 PL3.10 | length 608.2
  Top Layer w10: PL3.10@1186.61,157.48 1411.34,382.2 1590.24,382.2 1634.56,337.88 1634.56,293.39 IC1.14@1637.6,290.35
BD4: IC1.15 PL3.11 | length 769.7
  Top Layer w10: PL3.11@1086.61,157.48 1327.24,398.11 1621.57,398.11 1682.27,337.42 1682.27,295.69 IC1.15@1687.6,290.35
BD5: IC1.16 PL3.12 | length 933.6
  Top Layer w10: PL3.12@986.61,157.48 1243.15,414.02 1656.85,414.02 1732.98,337.88 1732.98,294.97 IC1.16@1737.6,290.35
BD6: IC1.17 PL3.13 | length 1097.5
  Top Layer w10: PL3.13@886.61,157.48 1159.06,429.92 1692.13,429.92 1784.16,337.88 1784.16,293.79 IC1.17@1787.6,290.35
BD7: IC1.18 PL3.14 | length 1259
  Top Layer w10: PL3.14@786.61,157.48 1074.96,445.83 1723.46,445.83 1832.07,337.22 1832.07,295.88 IC1.18@1837.6,290.35
BLA2: IC2.20 IC6.13 IC14.17 | length 3179.8
  Top Layer w10: IC6.13@2124.49,2165.51 1965.51,2165.51 1890,2090 1890,1212.36 v1(2240.16,862.2) ; v1(2326.77,633.66) 2327.28,633.66 2339.44,645.83 2881.73,645.83 2891.29,636.27 2902.91,636.27 v1(2905.51,633.66) 2908.12,636.27 2915.98,636.27 2925.39,645.67 3410.79,645.67 3429.8,626.65 IC2.20@3429.8,586.06 ; IC14.17@2905.32,524.61 2905.41,524.7 2905.41,586.52 v1(2905.51,586.61)
  Bottom Layer w10: v1(2240.16,862.2) 2242.09,862.2 2326.77,777.52 v1(2326.77,633.66) ; v1(2905.51,586.61) v1(2905.51,633.66)
BLA3: IC2.19 IC6.14 IC14.16 | length 3096
  Top Layer w10: IC6.14@2124.49,2145.83 1970.83,2145.83 1910,2085 1910,1227.8 v1(2283.46,854.33) ; v1(2350.39,614.17) 2366.14,629.92 2870.08,629.92 2889.68,610.32 2955.32,610.32 ; IC14.16@2955.32,524.61 2955.32,610.32 ; IC2.19@3410.12,586.06 3409.21,586.97 3409.21,614.2 3393.65,629.76 2974.75,629.76 2955.32,610.32
  Bottom Layer w10: v1(2283.46,854.33) 2284.96,854.33 2350.39,788.9 v1(2350.39,614.17)
BLA12: IC2.31 IC4.1 IC14.11 | length 2476
  Top Layer w10: IC4.1@2209.53,1279.96 2209.53,1339.45 2249.21,1379.13 2955.52,1379.13 3002.56,1332.1 3002.56,1231.73 3111.06,1123.23 3178.56,1123.23 3646.48,655.3 3646.48,652.6 3652.24,646.84 3652.24,639.46 3646.34,633.56 IC2.31@3646.34,586.06 ; IC14.11@3205.31,524.61 3206.99,526.28 3206.99,584.94 v1(3208.66,586.61)
  Bottom Layer w10: v1(3208.66,586.61) 3265.2,643.15 v1(3652.24,643.15)